# Altium PCB GSB-P01-V00.PcbDoc
Units mil, origin at the board's own origin, x right, y up, seen from the top; angles counter-clockwise.
Board outline 6000 x 4000 mil, 2 copper layers (Top Layer, Bottom Layer); 60 components, 41 nets, 207 pads, 0 vias.
Unrouted connection lines stored in the file: 142.
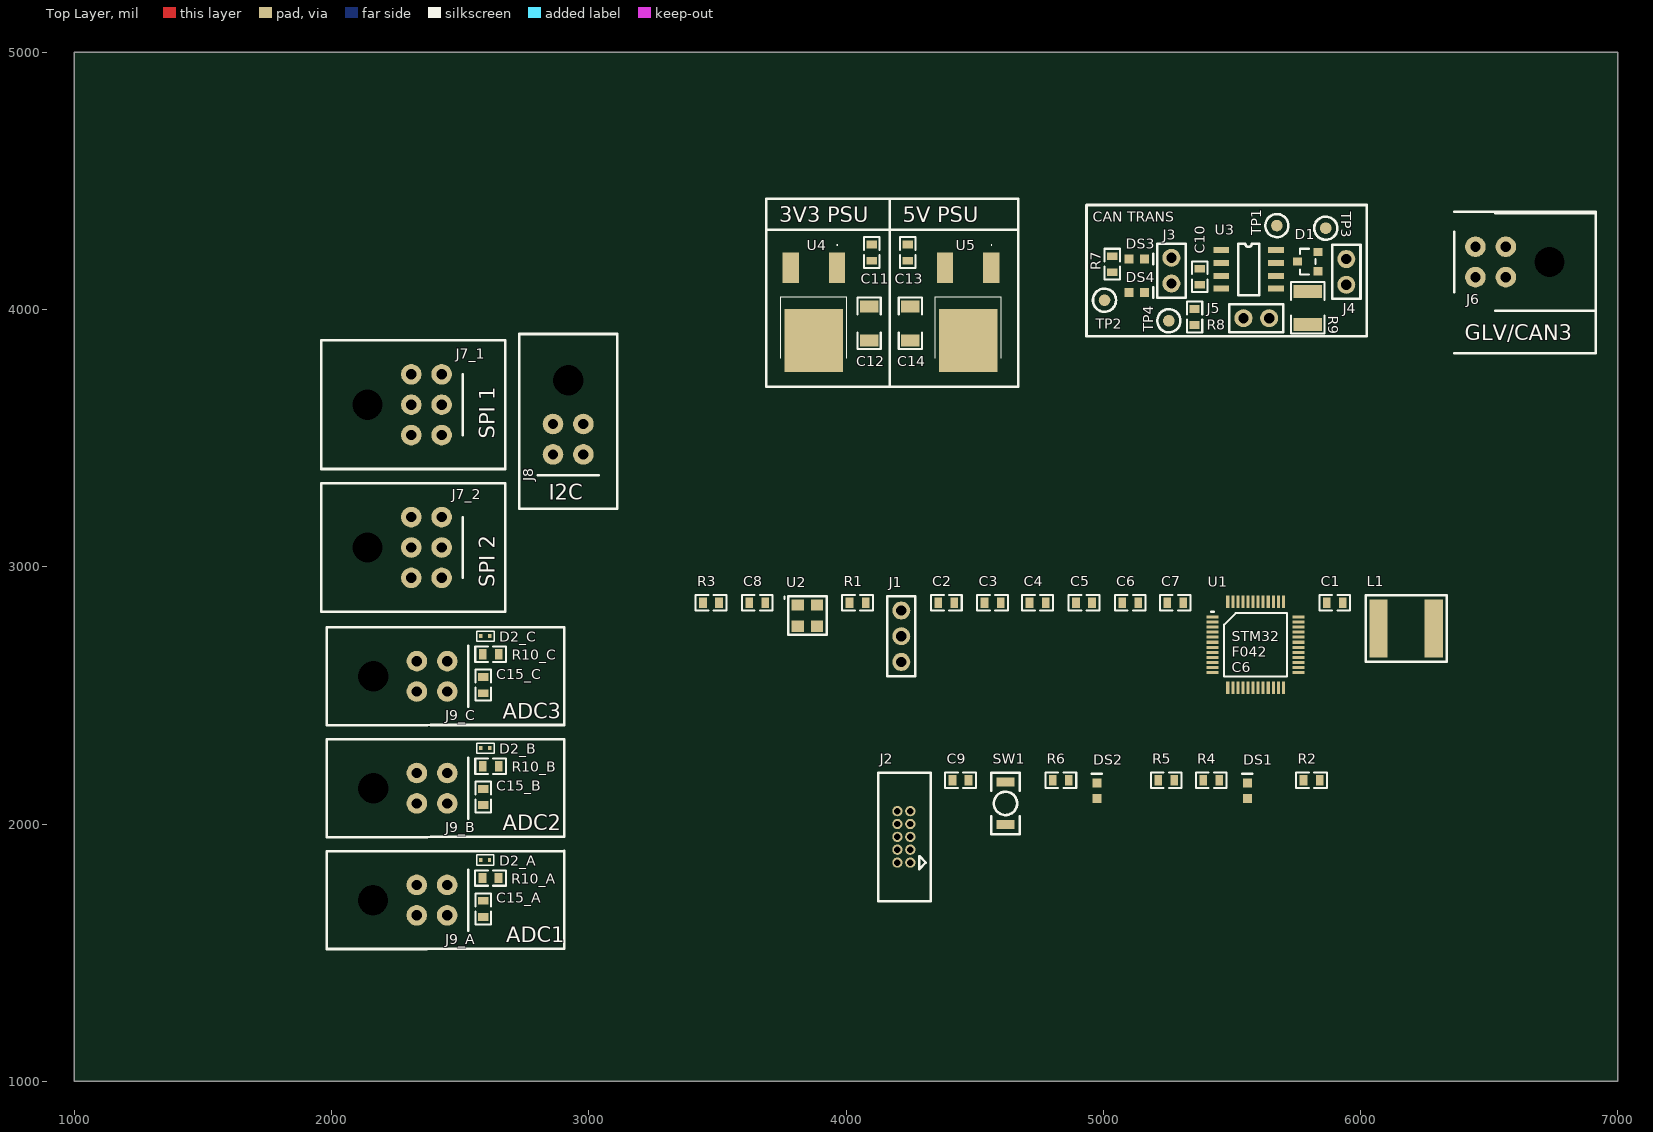
[diagram p0: Top Layer view]
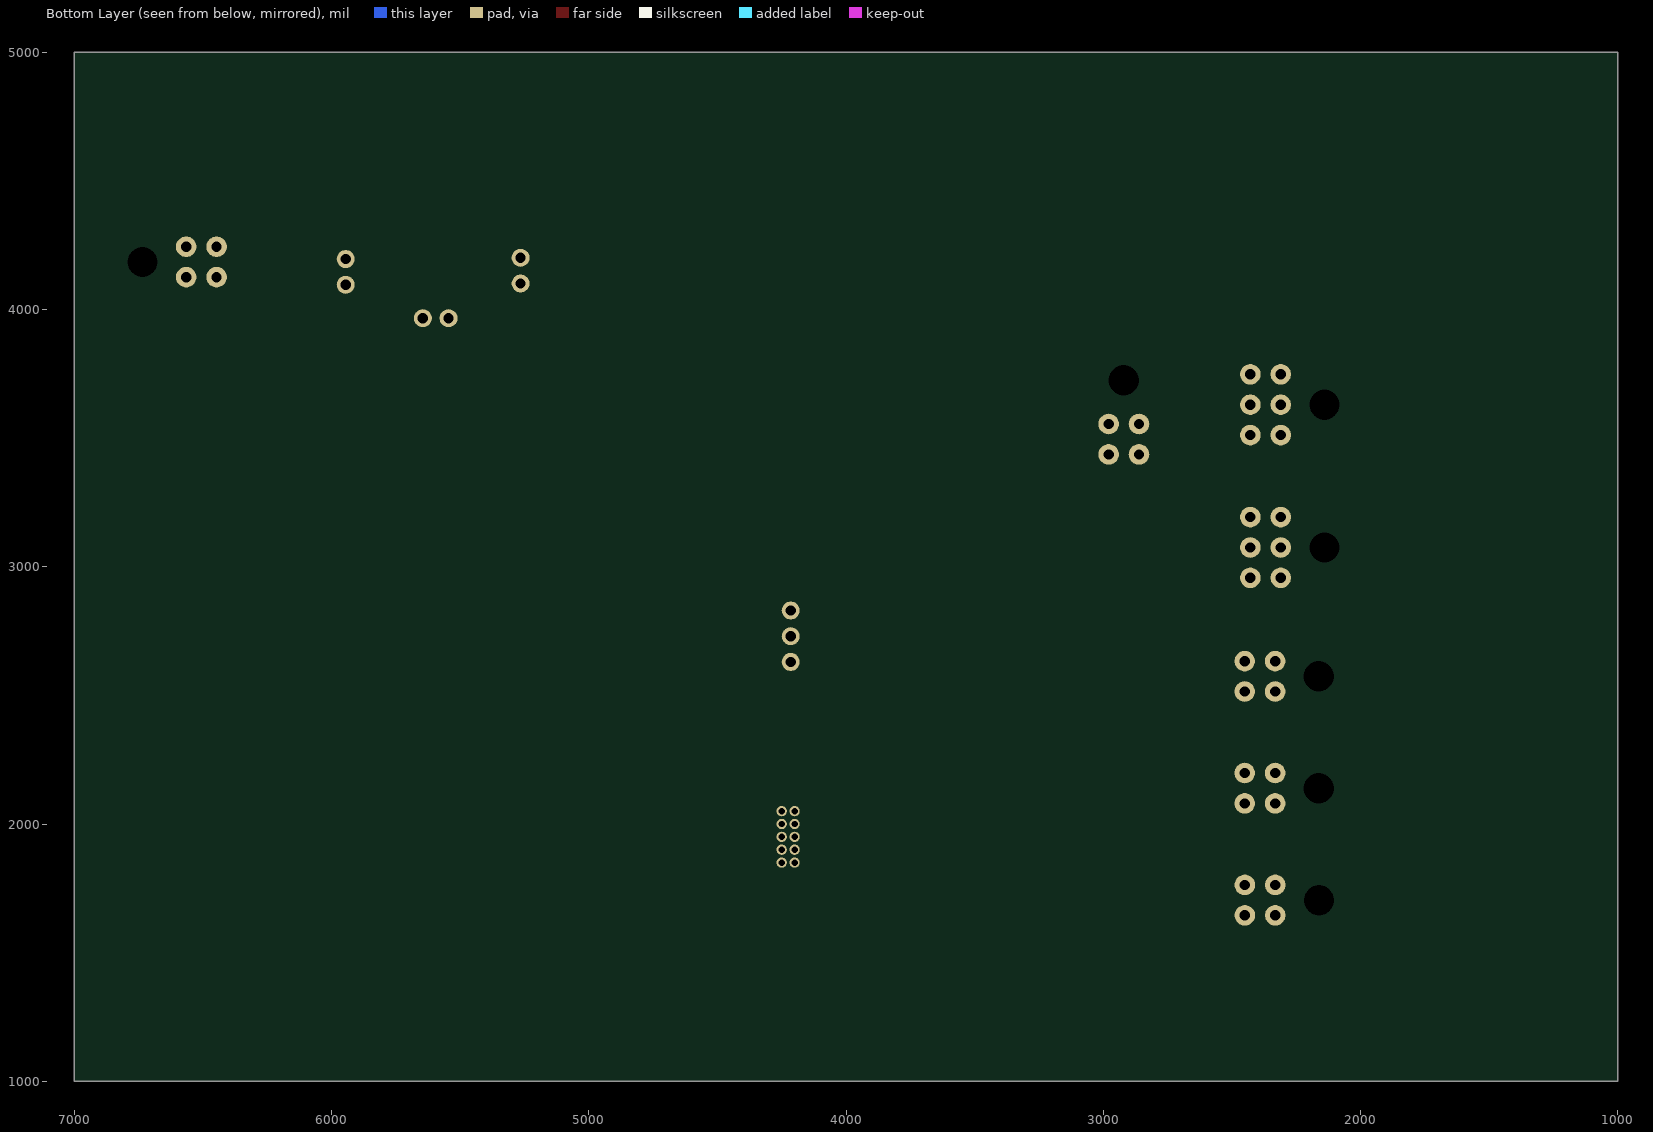
[diagram p1: Bottom Layer view, seen from below]

## Layer stack, top to bottom
Top Solder: solder mask 0.4, Solder Resist, Dk 3.5
Top Layer: signal copper 1.4
Dielectric 1: dielectric 12.6, FR-4, Dk 4.8
Bottom Layer: signal copper 1.4
Bottom Solder: solder mask 0.4, Solder Resist, Dk 3.5

## Board outline
1000,1000 7000,1000 7000,5000 1000,5000

## Design rules (kind name [scope] priority, off if disabled: settings)
Clearance [All] p1: gap=11.81 ignorepadtopadclearanceinfootprint=FALSE
PolygonConnect [All] p1: connectstyle=Relief reliefconductorwidth=10 reliefentries=4 polygonreliefangle="90 Angle" airgapwidth=10
RoomDefinition U_GSB-S05-V00-CAN3 [InComponentClass('U_GSB-S05-V00-CAN3')] p1: confinementstyle=ConfineIn formatcopy=TRUE lockcomponents=FALSE outline 4915,3870 6050,3870 6050,4425 4915,4425
RoomDefinition U_GSB-S05-V00-PSU5V [InComponentClass('U_GSB-S05-V00-PSU5V')] p2: confinementstyle=ConfineIn formatcopy=TRUE lockcomponents=FALSE outline 4155,3685 4685,3685 4685,4445 4155,4445
RoomDefinition U_GSB-S05-V00-PSU3V3 [InComponentClass('U_GSB-S05-V00-PSU3V3')] p3: confinementstyle=ConfineIn formatcopy=TRUE lockcomponents=FALSE outline 3675,3685 4185,3685 4185,4445 3675,4445
RoomDefinition U_GSB-S02-V00-Microcontroller [InComponentClass('U_GSB-S02-V00-Microcontroller')] p4: confinementstyle=ConfineIn formatcopy=TRUE lockcomponents=FALSE outline 3351.24,1535 6345,1535 6345,3000 3351.24,3000
RoomDefinition "SPI 2" [InComponentClass('SPI 2')] p5: confinementstyle=ConfineIn formatcopy=TRUE lockcomponents=FALSE outline 1950,3340 1950,2810 2695,2810 2695,3340
RoomDefinition "SPI 1" [InComponentClass('SPI 1')] p6: confinementstyle=ConfineIn formatcopy=TRUE lockcomponents=FALSE outline 1930,3915 1930,3365 2695,3365 2695,3915
RoomDefinition I2C [InComponentClass('I2C')] p7: confinementstyle=ConfineIn formatcopy=TRUE lockcomponents=FALSE outline 3125,3915 2715,3915 2715,3200 3125,3200
RoomDefinition "Car Microfit" [InComponentClass('Car Microfit')] p8: confinementstyle=ConfineIn formatcopy=TRUE lockcomponents=FALSE outline 6965,3800 6965,4390 6255,4390 6255,3800
RoomDefinition C [InComponentClass('C')] p9: confinementstyle=ConfineIn formatcopy=TRUE lockcomponents=FALSE outline 1950,2360 2940,2360 2940,2800 1950,2800
RoomDefinition B [InComponentClass('B')] p10: confinementstyle=ConfineIn formatcopy=TRUE lockcomponents=FALSE outline 1950,1925 2940,1925 2940,2365 1950,2365
RoomDefinition A [InComponentClass('A')] p11: confinementstyle=ConfineIn formatcopy=TRUE lockcomponents=FALSE outline 1949.45,1490 2939.45,1490 2939.45,1930 1949.45,1930
RoutingVias [All] p1: holewidth=11.81 width=23.62 viastyle="Through Hole" minholewidth=11.81 minwidth=23.62 maxholewidth=11.81 maxwidth=23.62
SolderMaskExpansion [All] p1: expansion=4 istentingtop=FALSE
Width [All] p1: maxlimit=39.37 minlimit=11.81 preferedwidth=19.68
30 further rules are at their usual default settings.

## Classes and differential pairs
component class C: C15_C D2_C J9_C R10_C
component class B: C15_B D2_B J9_B R10_B
component class A: C15_A D2_A J9_A R10_A
channel class GSB-S07-V00-SPImicrofit: "SPI 1" "SPI 2"
channel class GSB-S04-SensorMicrofit: U_GSB-S04-SensorMicrofit1 U_GSB-S04-SensorMicrofit2 U_GSB-S04-SensorMicrofit3
component class I2C: J8
component class U_GSB-S05-V00-PSU5V: C13 C14 U5
component class U_GSB-S05-V00-PSU3V3: C11 C12 U4
component class U_GSB-S05-V00-CAN3: C10 D1 DS3 DS4 J3 J4 J5 R7 R8 R9 TP1 TP2 TP3 TP4 U3
component class "Car Microfit": J6
component class U_GSB-S02-V00-Microcontroller: C1 C2 C3 C4 C5 C6 C7 C8 C9 DS1 DS2 J1 J2 L1 R1 R2 R3 R4 R5 R6 SW1 U1 U2

## Components (designator, comment, footprint, x,y, rotation, side; value= is the part's Value field where it differs from the comment)
C1 "100nF 50V 5% X7R 0603" Cap_Ceramic_0603 5900,2860 r0 top
C2 "100nF 50V 5% X7R 0603" Cap_Ceramic_0603 4390,2860 r0 top
C3 "4u7 50V 5% X7R 0603" Cap_Ceramic_0603 4570,2860 r0 top
C4 "100nF 50V 5% X7R 0603" Cap_Ceramic_0603 4745,2860 r0 top
C5 "4u7 50V 5% X7R 0603" Cap_Ceramic_0603 4925,2860 r0 top
C6 "100nF 50V 5% X7R 0603" Cap_Ceramic_0603 5105,2860 r0 top
C7 "4u7 50V 5% X7R 0603" Cap_Ceramic_0603 5280,2860 r0 top
C8 "100nF 50V 5% X7R 0603" Cap_Ceramic_0603 3655,2860 r0 top
C9 "100nF 50V 5% X7R 0603" Cap_Ceramic_0603 4445,2170 r0 top
C10 "100nF 100V 5% X7R 0603" Cap_Ceramic_0603 5375,4127.47 r270 top
C11 "100nF 50V 5% X7R 0603" Cap_Ceramic_0603 4100,4221.24 r90 top
C12 "10uF 25V 10% X7R 1206" Cap_Ceramic_1206 4090,3946.08 r270 top
C13 "100nF 50V 5% X7R 0603" Cap_Ceramic_0603 4240,4221.24 r90 top
C14 "22uF 35V 20% X5R 1206" Cap_Ceramic_1206 4250,3946.08 r270 top
C15_A "100nF 50V 5% X7R 0603" Cap_Ceramic_0603 2589.45,1670 r90 top (schematic designator C15)
C15_B "100nF 50V 5% X7R 0603" Cap_Ceramic_0603 2590,2105 r90 top (schematic designator C15)
C15_C "100nF 50V 5% X7R 0603" Cap_Ceramic_0603 2590,2540 r90 top (schematic designator C15)
D1 "NUP2105L" NUP2105L 5795,4186.24 r90 top
D2_A "ESD9B3.3ST5G" SOD-923 2580,1860 r270 top (schematic designator D2)
D2_B "ESD9B3.3ST5G" SOD-923 2580.55,2295 r270 top (schematic designator D2)
D2_C "ESD9B3.3ST5G" SOD-923 2580.55,2730 r270 top (schematic designator D2)
DS1 "LED Orange 0603" "LED ORANGE 0603" 5560,2130 r90 top
DS2 "LED Orange 0603" "LED ORANGE 0603" 4975,2130 r90 top
DS3 "LED Blue 0603" "LED BLUE 0603" 5130,4196.24 r0 top
DS4 "LED Blue 0603" "LED BLUE 0603" 5130,4066.24 r0 top
J1 "Jumper 3Way Pins" Jumper_3Way_Pin 4215,2730 r90 top
J2 "IDC 10P 2x5 1.27mm" "IDC 1.27MM 10P" 4225,1950 r90 top
J3 "Jumper 2Way Pins" Jumper_2Way_Pin 5265,4201.24 r90 top
J4 "Jumper 2Way Pins" Jumper_2Way_Pin 5945,4196.24 r90 top
J5 "Jumper 2Way Pins" Jumper_2Way_Pin 5645,3966.24 r0 top
J6 "Microfit 3.0 2x2" Microfit_2X2_R_TH 6735,4185 r90 top
J7_1 "Microfit 3.0 2x3" Microfit_2X3_R_TH 2140,3630 r270 top (schematic designator J7)
J7_2 "Microfit 3.0 2x3" Microfit_2X3_R_TH 2140,3075 r270 top (schematic designator J7)
J8 "Microfit 3.0 2x2" Microfit_2X2_R_TH 2920,3725 r180 top
J9_A "Microfit 3.0 2x2" Microfit_2X2_R_TH 2161.26,1704.06 r270 top (schematic designator J9)
J9_B "Microfit 3.0 2x2" Microfit_2X2_R_TH 2161.81,2139.06 r270 top (schematic designator J9)
J9_C "Microfit 3.0 2x2" Microfit_2X2_R_TH 2161.81,2574.06 r270 top (schematic designator J9)
L1 "74404064221" Inductor_6x6mm 6175,2760 r0 top
R1 "10k 5% 0603" Res_ThinFilm_0603 4045,2860 r0 top
R2 "2k2 5% 0603" Res_ThinFilm_0603 5810,2170 r0 top
R3 "2k2 5% 0603" Res_ThinFilm_0603 3475,2860 r0 top
R4 "330R 5% 0603" Res_ThinFilm_0603 5420,2170 r0 top
R5 "4k7 5% 0603" Res_ThinFilm_0603 5245,2170 r0 top
R6 "330R 5% 0603" Res_ThinFilm_0603 4835,2170 r0 top
R7 "330R 5% 0603" Res_ThinFilm_0603 5035,4176.24 r90 top
R8 "330R 5% 0603" Res_ThinFilm_0603 5355,3971.24 r270 top
R9 "120R 1% 1210" Res_ThinFilm_1210 5795,4006.24 r90 top
R10_A "10k 5% 0603" Res_ThinFilm_0603 2618.21,1790 r180 top (schematic designator R10)
R10_B "10k 5% 0603" Res_ThinFilm_0603 2618.76,2225 r180 top (schematic designator R10)
R10_C "10k 5% 0603" Res_ThinFilm_0603 2618.76,2660 r180 top (schematic designator R10)
SW1 "B3U-1000P" "BTN B3U-1000P" 4620,2080 r90 top
TP1 "TestPoint_SMD" TestPointSMD 5675,4326.24 r0 top
TP2 "TestPoint_SMD" TestPointSMD 5005,4036.24 r0 top
TP3 "TestPoint_SMD" TestPointSMD 5865,4316.24 r0 top
TP4 "TestPoint_SMD" TestPointSMD 5255,3956.24 r0 top
U1 "STM32F042C6" STM32F042C6 5425,2805 r0 top
U2 "DSC1001DI1-008.0000T" DSC1001DI1-008.0000TCT-ND 3850,2810 r0 top
U3 "SN65HVD233" SN65HVD233DR 5565,4156.24 r0 top
U4 "NCV4274C" NCV4274CDT50RKG 3875,3810.32 r90 top
U5 "NCV4274C" NCV4274CDT50RKG 4475,3810.32 r90 top

## Footprints (in the part's own frame and the unit in brackets; to place one, negate y for a bottom-side part, rotate by r counter-clockwise, add the part's x,y. Pads: shape width x height; smd on the part's side, far side on the other; paste and mask are expansions set on the pad)
"BTN B3U-1000P" [mil] "OMRON B3U-1000P"
  rect 35x70 smd: 1(-82.68,0) 2(82.68,0)
  silkscreen extent -120,-55 120,55, body extent -79,-49 79,49, height 63
Cap_Ceramic_0603 [mil]
  rect 30x40 smd: 1(-31.24,0) 2(31.24,0)
  silkscreen extent -60,-30 60,30, body extent -31,-16 32,16, height 33
Cap_Ceramic_1206 [mil]
  rect 47x71 smd: 1(-66.08,0) 2(66.08,0)
  silkscreen extent -100,-45 100,45, body extent -63,-31 63,32, height 53
DSC1001DI1-008.0000TCT-ND [mil]
  rect 48x43 smd: 1(-37.4,41.34) 2(-37.4,-41.34) 3(37.4,-41.34) 4(37.4,41.34)
  silkscreen extent -90,-75 75,75, body extent -49,-63 49,63, height 33
"IDC 1.27MM 10P" [mil]
  round 40 hole 25: 1(-100,-25) 2(-100,25) 3(-50,-25) 4(-50,25) 5(0,-25) 6(0,25) 7(50,-25) 8(50,25) 9(100,-25) 10(100,25)
  silkscreen extent -250,-105 250,100, body extent -249,-104 249,100, height 214
Inductor_6x6mm [mm]
  rect 1.8x5.7 smd: 1(-2.667,0) 2(2.794,0)
  silkscreen extent -3.94,-3.3 4.06,3.3, body extent -3,-3 3,3, height 4.56
Jumper_2Way_Pin [mil]
  round 70 hole 40: 1(-100,0) 2(0,0)
  silkscreen extent -155,-55 55,55, body extent -142,-48 42,47, height 332
Jumper_3Way_Pin [mil]
  round 70 hole 40: 1(-100,0) 2(0,0) 3(100,0)
  silkscreen extent -155,-55 155,55, body extent -142,-48 142,47, height 332
"LED BLUE 0603" [mil]
  rect 35x35 smd: 1(-30,0) 2(30,0)
  silkscreen extent 65,-20 65,20, body extent -40,-20 40,20, height 30
"LED ORANGE 0603" [mil]
  rect 35x35 smd: 1(-30,0) 2(30,0)
  silkscreen extent 65,-20 65,20, body extent -40,-20 40,20, height 30
Microfit_2X2_R_TH [mil]
  round 80 hole 40: 1(59.05,170) 2(-59.06,170) 3(59.05,288.19) 4(-59.06,288.19)
  round 0 hole 118.11 mask+10: NC(0,0)
  silkscreen extent -190,-180 190,370, body extent -200,-180 200,302, height 350
Microfit_2X3_R_TH [mil]
  round 80 hole 40: 1(118.11,170) 2(0,170) 3(-118.11,170) 4(118.11,288.19) 5(0,288.19) 6(-118.11,288.19)
  round 0 hole 118.11 mask+10: NC(0,0)
  silkscreen extent -250,-180 250,370, body extent -259,-180 259,302, height 350
NCV4274CDT50RKG [mm]
  rect 3x1.6 smd: 1(8.95,-2.285) 3(8.95,2.285)
  rect 6.2x5.8 smd: 2(1.77,0)
  silkscreen extent 0,-3.25 11.22,3.25
NUP2105L [mm]
  rect 0.8x0.9 smd: 1(-0.95,-1) 2(0.95,-1) 3(0,1)
  silkscreen extent -1.27,-0.76 1.27,0.76, body extent -1.45,-1.22 1.45,1.18, height 1
Res_ThinFilm_0603 [mil]
  rect 30x40 smd: 1(-31.24,0) 2(31.24,0)
  silkscreen extent -60,-30 60,30, body extent -31,-16 32,16, height 18
Res_ThinFilm_1210 [mm]
  rect 1.3x2.8 smd: 1(-1.625,0) 2(1.625,0)
  silkscreen extent -2.54,-1.65 2.54,1.65, body extent -1.6,-1.25 1.6,1.25, height 0.6
SN65HVD233DR [mm]
  rect 1.55x0.6 smd: 1(-2.7,1.903) 2(-2.7,0.633) 3(-2.7,-0.637) 4(-2.7,-1.907) 5(2.7,-1.907) 6(2.7,-0.637) 7(2.7,0.633) 8(2.7,1.903)
  silkscreen extent -1.04,-2.54 1.04,2.54, body extent -3.01,-2.45 3.01,2.45, height 1.63
SOD-923 [mm]
  rect 0.4x0.325 smd: 1(0,0.875) 2(0,0)
  silkscreen extent -0.5,-0.4 0.5,1.3
STM32F042C6 [mm]
  rect 1.2x0.3 smd: 1(0,0) 2(0,-0.5) 3(0,-1) 4(0,-1.5) 5(0,-2) 6(0,-2.5) 7(0,-3) 8(0,-3.5) 9(0,-4) 10(0,-4.5) 11(0,-5) 12(0,-5.5) 25(8.5,-5.5) 26(8.5,-5) 27(8.5,-4.5) 28(8.5,-4) 29(8.5,-3.5) 30(8.5,-3) 31(8.5,-2.5) 32(8.5,-2) 33(8.5,-1.5) 34(8.5,-1) 35(8.5,-0.5) 36(8.5,0)
  rect 0.3x1.2 smd: 13(1.5,-7) 14(2,-7) 15(2.5,-7) 16(3,-7) 17(3.5,-7) 18(4,-7) 19(4.5,-7) 20(5,-7) 21(5.5,-7) 22(6,-7) 23(6.5,-7) 24(7,-7) 37(7,1.5) 38(6.5,1.5) 39(6,1.5) 40(5.5,1.5) 41(5,1.5) 42(4.5,1.5) 43(4,1.5) 44(3.5,1.5) 45(3,1.5) 46(2.5,1.5) 47(2,1.5) 48(1.5,1.5)
  silkscreen extent -0.13,-5.86 7.36,0.51, body extent -0.27,-7.26 8.76,1.77, height 1.5
TestPointSMD [mil]
  round 45 smd: 1(0,0)
  silkscreen extent -45,-45 45,45

## Part data
C1 C2 C4 C6 C8 C9 C11 C13 C15_A C15_B C15_C: "Capacitor, Ceramic, SMD, 100nF, 50V, 5%, X7R, 0603"
C3 C5 C7: "Capacitor, Ceramic, SMD, 4u7, 50V, 5%, X7R, 0603"
C10: "Capacitor, Ceramic, SMD, 100nF, 100V, 5%, X7R, 0603"
C12: "Capacitor, Ceramic, SMD, 10uF, 25V, 10%, X7R, 1206"
C14: "22µF ±20% 35V Ceramic Capacitor X5R 1206 (3216 Metric)", ComponentLink1Description=Digikey, ComponentLink1URL=https://www.digikey.com.au/product-detail/en/tdk-corporation/C3216X5R1V226M160AC/445-8045-1-ND/2792165, ComponentLink2Description=Datasheet, ComponentLink2URL=https://product.tdk.com/info/en/catalog/datasheets/mlcc_commercial_general_en.pdf
D2_A D2_B D2_C: "11.5V Clamp 2A (8/20µs) Ipp Tvs Diode Surface Mount SOD-923", Manufacturer="ON Semiconductor", ComponentLink1Description=Digikey, ComponentLink1URL=https://www.digikey.com.au/product-detail/en/on-semiconductor/ESD9B3.3ST5G/ESD9B3.3ST5GOSCT-ND/2704995, ComponentLink2Description=Datasheet, ComponentLink2URL=https://www.onsemi.cn/pub/Collateral/ESD9B-D.PDF, MPN=ESD9B3.3ST5G
DS1 DS2: library part "LED ORANGE 0603"
DS3 DS4: library part "LED BLUE 0603"
J1: library part "Jumper 3Way Side Pins", "Jumper 3Way Side Pins"
J3 J4 J5: library part "Jumper 2Way Side Pins", "Jumper 2Way Side Pins"
J6 J8 J9_A J9_B J9_C: library part Microfit_2x2
J7_1 J7_2: library part Microfit_2x3
L1: "FIXED IND 220UH 660MA 850 MOHM", ComponentLink1Description=Digikey, ComponentLink1URL=https://www.digikey.com.au/product-detail/en/w%C3%BCrth-elektronik/74404064221/732-7261-1-ND/5353241, ComponentLink2Description="LCSC A", ComponentLink2URL=https://lcsc.com/product-detail/Power-Inductors_Sunlord-SWPA6045S221MT_C91047.html, ComponentLink3Description="LCSC B", ComponentLink3URL=https://lcsc.com/product-detail/Power-Inductors_SXN-Shun-Xiang-Nuo-Elec-SMNR6045-221MT_C467145.html
R1 R10_A R10_B R10_C: "Resistor, SMD, 10k, 0.1W, 5%, 0603"
R2 R3: "Resistor, SMD, 2k2, 0.1W, 5%, 0603"
R4 R6 R7 R8: "Resistor, SMD, 330R, 0.1W, 5%, 0603"
R5: "Resistor, SMD, 4k7, 0.1W, 5%, 0603"
R9: "Resistor, SMD, 120R, 0.25W, 1%, 1210"
SW1: library part "BTN B3U-1000P", "Omron B3U-1000P Ultra Miniture Switch", ComponentLink1Description=LCSC, ComponentLink1URL=https://lcsc.com/product-detail/Tactile-Switches_BRIGHT-TSA063G50-250_C294565.html
U1: "ARM® Cortex®-M0 STM32F0 Microcontroller IC 32-Bit 48MHz 32KB (32K x 8) FLASH 48-LQFP (7x7)", ComponentLink1Description=Digikey, ComponentLink1URL=https://www.digikey.com.au/product-detail/en/stmicroelectronics/STM32F042C6T6TR/497-19319-1-ND/10063344, ComponentLink2Description=Datasheet, ComponentLink2URL=https://www.st.com/resource/en/datasheet/stm32f042k6.pdf
U2: "8MHz XO (Standard) CMOS Oscillator 1.8 ~ 3.3V Standby (Power Down) 4-SMD, No Lead"
U4 U5: "Integrated Circuit", Arrow Part Number=NCV4274CDT50RKG, Manufacturer_Name="ON Semiconductor", Mouser Part Number=863-NCV4274CDT50RKG, Arrow Price/Stock=https://www.arrow.com/en/products/ncv4274cdt50rkg/on-semiconductor, Datasheet Link=https://www.onsemi.com/pub/Collateral/NCV4274C-D.PDF, Height=2.38mm, Manufacturer_Part_Number=NCV4274CDT50RKG, Mouser Price/Stock=https://www.mouser.co.uk/ProductDetail/ON-Semiconductor/NCV4274CDT50RKG?qs=tCMd4XlZ%2FiBk5MdmOBr7cw%3D%3D
D1: ComponentLink1Description=Datasheet, ComponentLink1URL=https://www.onsemi.cn/PowerSolutions/document/NUP2105L-D.PDF, ComponentLink2Description=LCSC, ComponentLink2URL=https://lcsc.com/product-detail/TVS_ON-Semiconductor-NUP2105LT1G_C14486.html, ComponentLink3Description=Digikey, ComponentLink3URL=https://www.digikey.com.au/product-detail/en/on-semiconductor/SZNUP2105LT1G/SZNUP2105LT1GOSCT-ND/3487669
U3: ComponentLink1Description=LCSC, ComponentLink1URL=https://lcsc.com/product-detail/CAN-ICs_Texas-Instruments_SN65HVD233DRG4_Texas-Instruments-Texas-Instruments-SN65HVD233DRG4_C61643.html, ComponentLink2Description=Digikey, ComponentLink2URL=https://www.digikey.com.au/product-detail/en/texas-instruments/SN65HVD233DR/296-35967-1-ND/4134960, ComponentLink3Description=Datasheet, ComponentLink3URL=https://www.ti.com/lit/ds/symlink/sn65hvd233.pdf?ts=1588560888178, ComponentLink4Description="Ti Product Page", ComponentLink4URL=https://www.ti.com/product/SN65HVD233

## Nets (pads, with @x,y where several pads share a name; then routed paths per layer and width w, separated by ;. In a path a pad name is that pad's centre, name@x,y a point inside that pad or via, vN(x,y) a via of type N, cw(c..) or ccw(c..) an arc to the next point about the centre after c; other vN are vias at no path point)
3V3: C2.2 C3.2 C4.2 C5.2 C6.2 C7.2 C8.2 C10.2 C12.2 J2.1 J3.1 J5.1 J7_1.1 J7_2.1 J8.1 J9_A.1 J9_B.1 J9_C.1 L1.1 R2.2 R3.2 R4.2 R5.2 R6.2 U1.1 U1.24 U1.36 U1.48 U2.1 U2.4 U3.3 U4.3
5V: C14.2 J9_A.2 J9_B.2 J9_C.2 U5.3
12V: C11.2 C13.2 J6.1 U4.1 U5.1
"CAN3 LED": DS3.1 DS4.1 J3.2
"CAN3 RX": R8.1 TP4.1 U1.33 U3.4
"CAN3 RX LED": DS4.2 R8.2
"CAN3 TX": R7.1 TP2.1 U1.32 U3.1
"CAN3 TX LED": DS3.2 R7.2
CAN3H: D1.2 J4.1 J6.2 TP1.1 U3.7
CAN3L: D1.1 J6.4 R9.1 TP3.1 U3.6
"CAN LBK": J5.2 U3.5
GND: C1.1 C2.1 C3.1 C4.1 C5.1 C6.1 C7.1 C8.1 C9.1 C10.1 C11.1 C12.1 C13.1 C14.1 C15_A.1 C15_B.1 C15_C.1 D1.3 D2_A.1 D2_B.1 D2_C.1 J1.1 J2.3 J2.5 J2.9 J6.3 J7_1.4 J7_2.4 J8.3 J9_A.3 J9_B.3 J9_C.3 R1.1 SW1.1 U1.6 U1.8 U1.23 U1.35 U1.47 U2.2 U3.2 U3.8 U4.2 U5.2
"I2C1 SCL": J8.2 R2.1 U1.42
"I2C1 SDA": J8.4 R3.1 U1.43
LED0: DS1.2 U1.46
LED1: DS2.2 U1.21
NetC1_2: C1.2 L1.2 U1.9
NetD2_A_2: D2_A.2 J9_A.4 R10_A.2
NetD2_B_2: D2_B.2 J9_B.4 R10_B.2
NetD2_C_2: D2_C.2 J9_C.4 R10_C.2
NetDS1_1: DS1.1 R4.1
NetDS2_1: DS2.1 R6.1
NetJ4_2: J4.2 R9.2
NetR1_2: R1.2 U1.44
NRST: C9.2 J2.10 R5.1 SW1.2 U1.7
"OSC IN": U1.5 U2.3
"SENSOR ADC1": C15_A.2 R10_A.1 U1.11
"SENSOR ADC2": C15_B.2 R10_B.1 U1.12
"SENSOR ADC3": C15_C.2 R10_C.1 U1.13
"SPI MISO1": J7_1.5 U1.16
"SPI MISO2": J7_2.5 U1.27
"SPI MOSI1": J7_1.6 U1.17
"SPI MOSI2": J7_2.6 U1.28
"SPI NSS1": J7_1.2 U1.14
"SPI NSS2": J7_2.2 U1.25
"SPI SCK1": J7_1.3 U1.15
"SPI SCK2": J7_2.3 U1.26
SWCLK: J2.4 U1.37
SWDIO: J2.2 U1.34
"USART1 RX": J1.2 U1.31
"USART1 TX": J1.3 U1.30
pads on no net: J2.6 J2.7 J2.8 J6.NC J7_1.NC J7_2.NC J8.NC J9_A.NC J9_B.NC J9_C.NC U1.2 U1.3 U1.4 U1.10 U1.18 U1.19 U1.20 U1.22 U1.29 U1.38 U1.39 U1.40 U1.41 U1.45

## Silkscreen, mask and mechanical layers (free items; w line width, h text height)
Top Overlay:
  lines w10: 2350,2825 2675,2825 2675,3325 2655,3325 2350,3325 ; 2350,3380 2675,3380 2675,3880 2655,3880 2350,3880 ; 2371.26,1514.06 2384.45,1515 2874.45,1515 2904.45,1515 2904.45,1545 2904.45,1895 2371.26,1894.06 ; 2371.81,1949.06 2385,1950 2875,1950 2905,1950 2905,1980 2905,2330 2371.81,2329.06 ; 2371.81,2384.06 2385,2385 2875,2385 2905,2385 2905,2415 2905,2765 2371.81,2764.05 ; 2730,3515 2730,3225 3110,3225 3110,3515 ; 4670,4310 4180,4310 4170,4310 ; 6365,3830 6915,3830 6915,3995 ; 6365,4380 6915,4380 6915,4375 ; 3690,4310 3690,4430 4170,4430 ; 3690,4310 4170,4310 ; 3690,4310 3690,4070 3690,3700 4170,3700 ; 4170,3700 4190,3700 4670,3700 4670,4210 4670,4430 4170,4430 ; 4170,3700 4170,3890 4170,4030 4170,4190 4170,4310 ; 4170,3700 4170,4310 ; 4170,4310 4170,4430 ; 4170,4310 4170,4430 ; 4935,3896.24 6025,3896.24 6025,4406.24 4935,4406.24 4935,3896.24
  text "CAN TRANS" at 4960,4341.24 h40
  text "3V3 PSU" at 3740,4340 h60
  text "5V PSU" at 4220,4340 h60
  text "GLV/CAN3" at 6405,3880 h60
  text "SPI 1" at 2635,3496.89 h60 r90
  text "I2C" at 2845,3260 h60
  text "SPI 2" at 2635,2920 h60 r90
  text "ADC3" at 2665,2410 h60
  text "ADC2" at 2665,1975 h60
  text "ADC1" at 2679.45,1540 h60

## Text inside footprints (layer, text, board x,y; h text height)
U1: Top Overlay "STM32 / F042 / C6" at 5500,2589.82 h40